# Altium PCB PunkController-PCB.PcbDoc
Units mm, origin at the board's own origin, x right, y up, seen from the top; angles counter-clockwise.
Board outline 65 x 80 mm, 2 copper layers (Top Layer, Bottom Layer); 21 components, 32 nets, 107 pads, 100 vias.
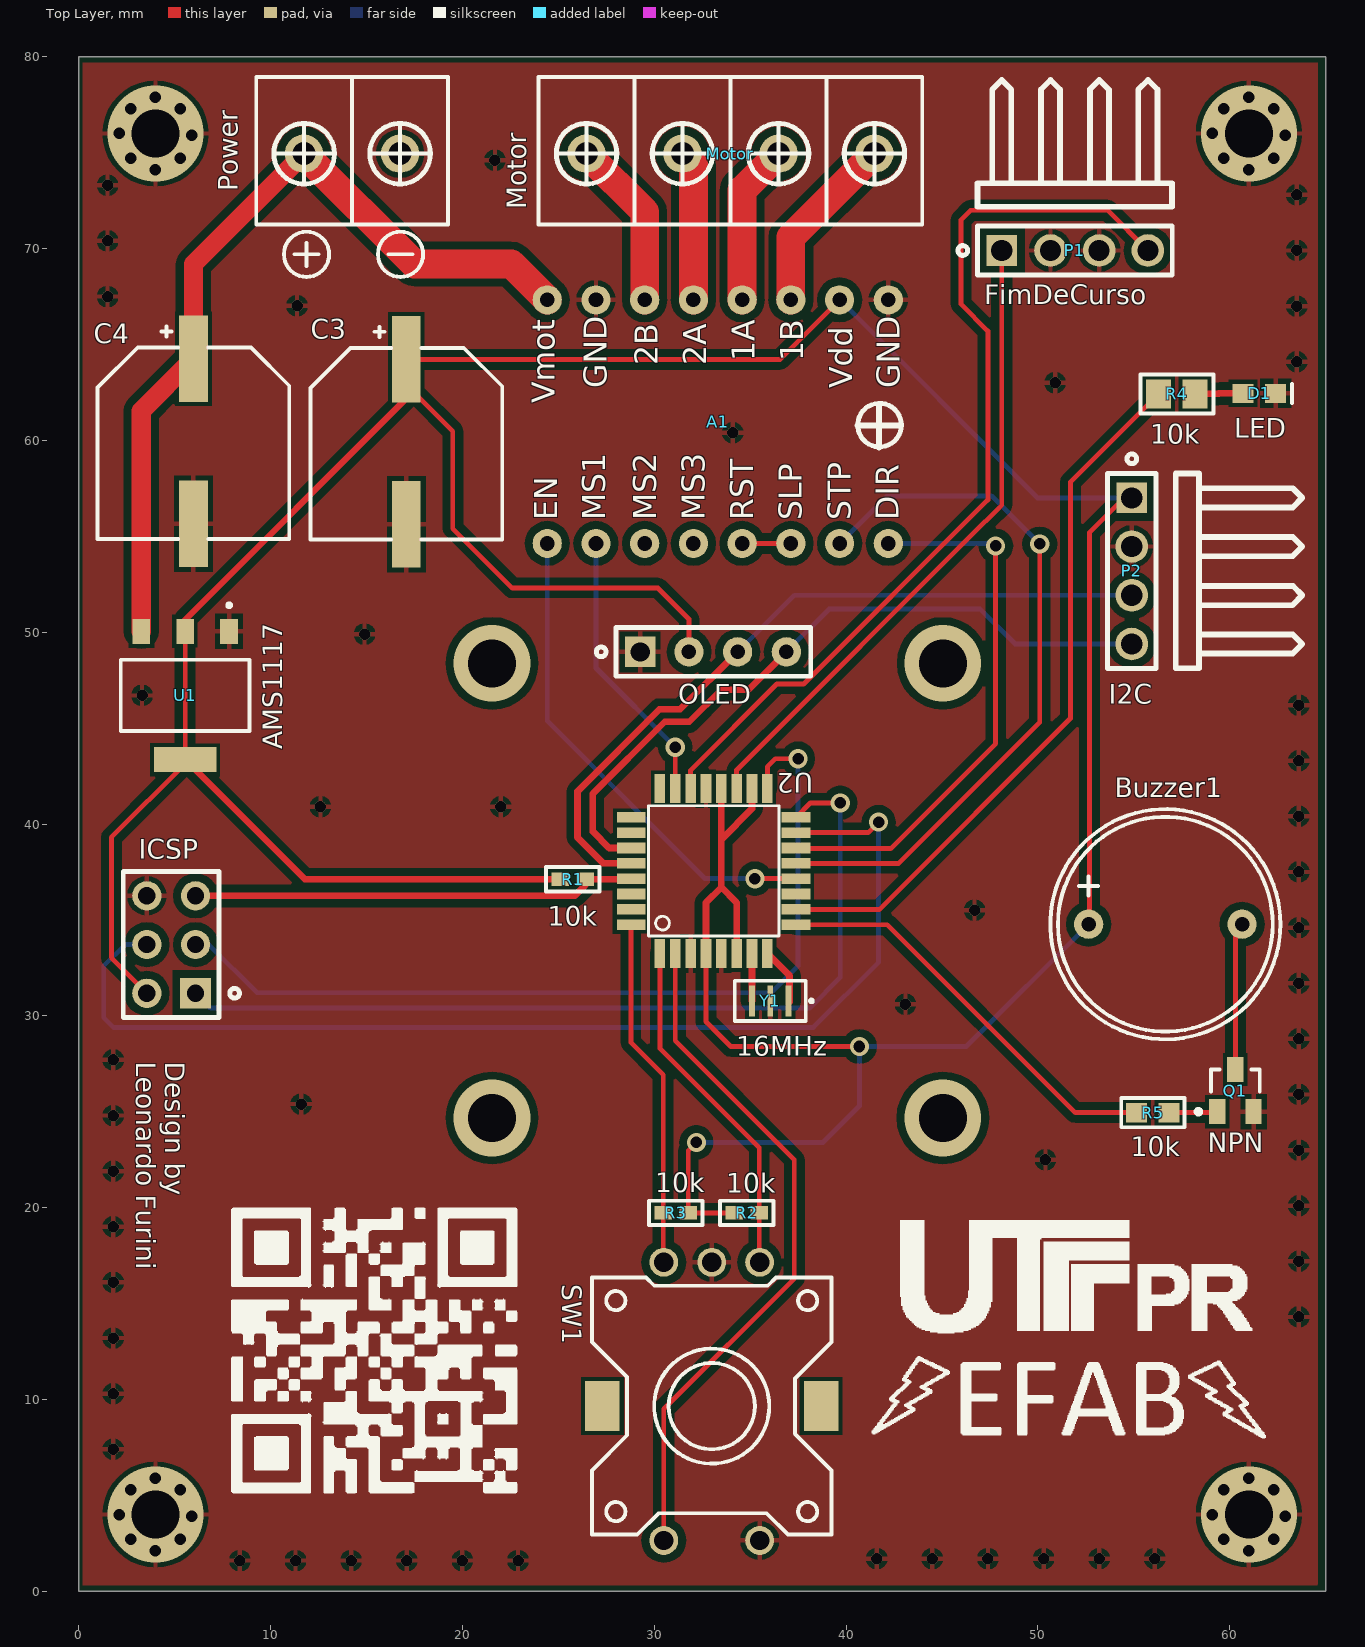
[diagram p0: Top Layer view]
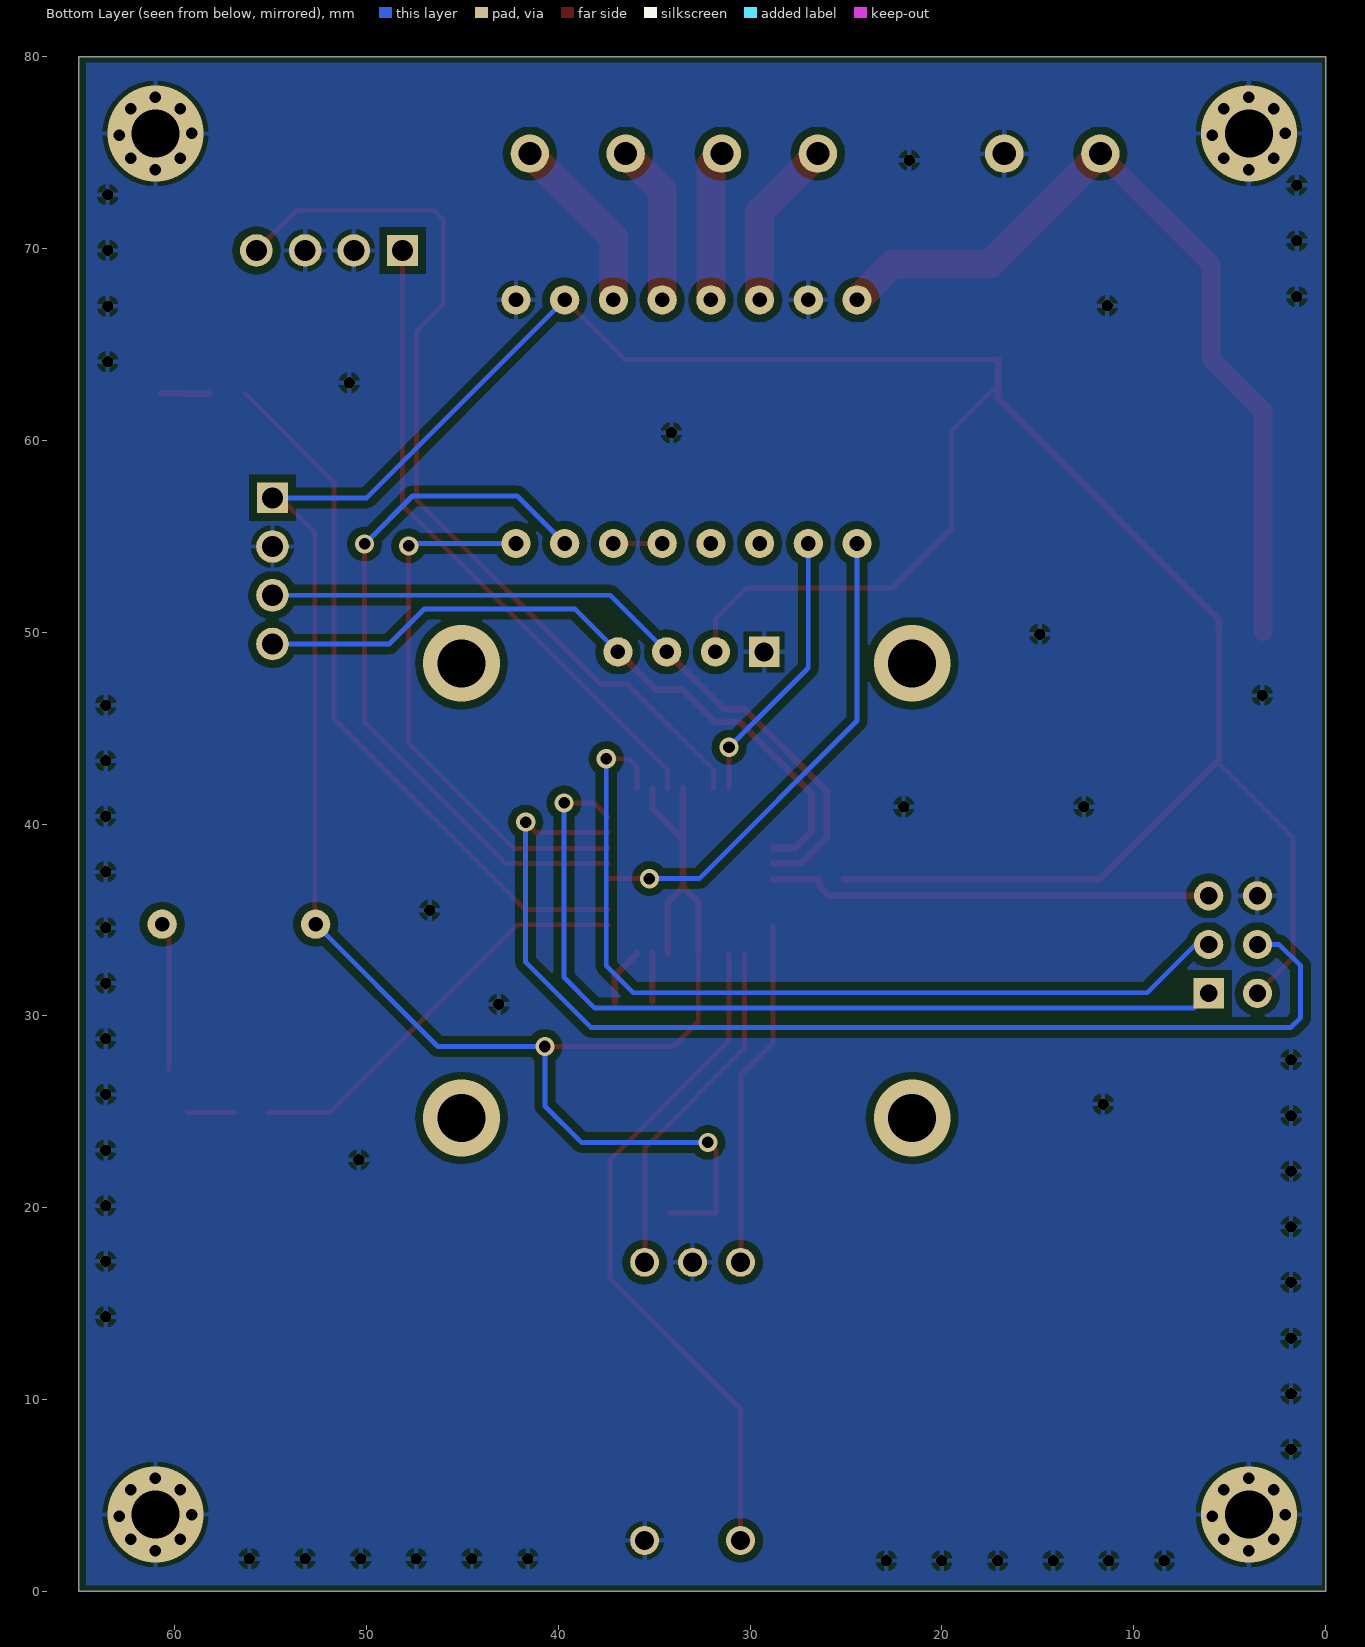
[diagram p1: Bottom Layer view, seen from below]
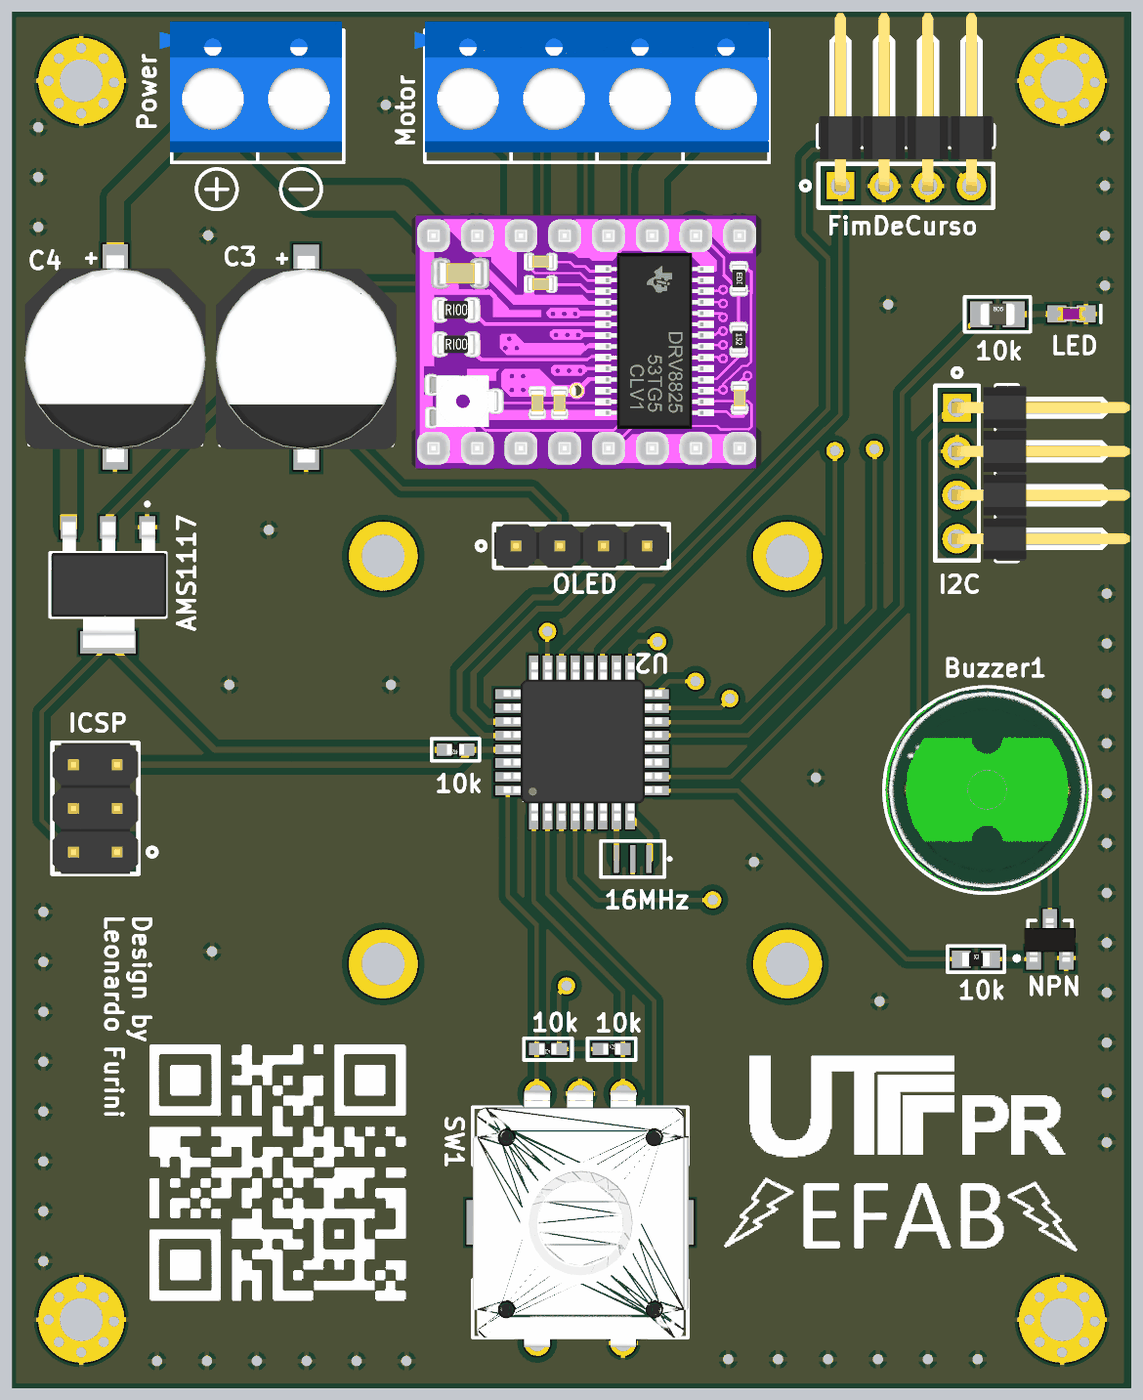
[diagram p2: 3D render of the assembled board from above, using the file's embedded part models]

## Layer stack, top to bottom
Top Solder: solder mask 0.0102, Solder Resist, Dk 3.5
Top Layer: signal copper 0.0356
Dielectric 1: dielectric 0.32, FR-4, Dk 4.8
Bottom Layer: signal copper 0.0356
Bottom Solder: solder mask 0.0102, Solder Resist, Dk 3.5

## Board outline
0,0 0,80 65,80 65,0

## Design rules (kind name [scope] priority, off if disabled: settings)
Clearance [All] p1: gap=0.2 ignorepadtopadclearanceinfootprint=FALSE except(0.3: Arc-Arc Arc-Track Arc-Via Track-Track Track-Via; 0.4: Arc-Fill Arc-Poly Arc-Region Track-Fill Track-Poly Track-Region THPad-Fill THPad-Poly THPad-Region Via-Fill Via-Poly Via-Region Via-Hole; 0.5: Arc-THPad Track-THPad; 0.8: Arc-Hole Track-Hole; 1: SMDPad-Hole THPad-Hole)
ComponentClearance [All] p1 off: gap=0.254 collisioncheckmode=3 verticalgap=0.254 showdistances=FALSE
Height [All] p1 off: minheight=0 maxheight=25.4 prefheight=12.7
PolygonConnect [All] p1: connectstyle=Relief reliefconductorwidth=0.254 reliefentries=4 polygonreliefangle="90 Angle" airgapwidth=0.254
RoutingVias [All] p1: holewidth=0.711 width=1.27 viastyle="Through Hole" minholewidth=0.711 minwidth=1.27 maxholewidth=0.711 maxwidth=1.27
SolderMaskExpansion [All] p1: expansion=0.102
Width [All] p1: maxlimit=1.5 minlimit=0.254 preferedwidth=0.35 minimp=50.000000 maximp=50.000000 favimp=50.000000
28 further rules are at their usual default settings.

## Components (designator, comment, footprint, x,y, rotation, side; value= is the part's Value field where it differs from the comment)
A1 "driver A4988" A4988 24.425,54.625 r90 top
Buzzer1 "Buzzer" "BUZZER 12MM" 56.65,34.775 r0 top
C3 "Capacitor Pol" CAP_AL_SMD_C6_10X10MM 17.075,59.825 r90 top
C4 "470uf" CAP_AL_SMD_C6_10X10MM 5.975,59.85 r90 top
D1 "LED" LED-0603-R 61.55,62.45 r0 top
ICSP "Header 3X2" HDR2X3M 6.09,31.175 r180 top
Motor "Motor" KRE-4 23.975,71.25 r0 top locked
OLED "Header 1x4" HDR1X4M 29.27,48.975 r0 top
P1 "FimDeCurso" HDR1X4-D 48.12,69.9 r0 top
P2 "I2C" HDR1X4-D 54.9,57.005 r270 top
Power "Power" KRE-2 9.25,71.25 r0 top
Q1 "NPN" SOT23 60.3,26.1 r0 top
R1 "10k" R1005[0402] 25.75,37.125 r180 top value=0
R2 "10k" R1005[0402] 34.825,19.725 r0 top value=0
R3 "10k" R1005[0402] 31.125,19.725 r180 top value=0
R4 "10k" R2012[0805] 57.25,62.425 r0 top value=0
R5 "10k" R1608[0603] 56,24.95 r0 top value=0
SW1 "PEC11R-4215F-S0024" ENCODER 33,9.65 r180 top
U1 "AMS1117" AMS1117 5.55,46.7 r270 top
U2 "ATMEGA328P-MU" "ATMEGA SMD" 33.1,37.55 r90 top
Y1 "16MHz" CRYSTAL-SMD 36.05,30.775 r180 top

## Footprints (in the part's own frame and the unit in brackets; to place one, negate y for a bottom-side part, rotate by r counter-clockwise, add the part's x,y. Pads: shape width x height; smd on the part's side, far side on the other; paste and mask are expansions set on the pad)
A4988 [mil]
  round 60 hole 30: 1(0,0) 2(0,-100) 3(0,-200) 4(0,-300) 5(0,-400) 6(0,-500) 7(0,-600) 8(0,-700) 9(500,-700) 10(500,-600) 11(500,-500) 12(500,-400) 13(500,-300) 14(500,-200) 15(500,-100) 16(500,0)
  silkscreen extent 197,-727 288,-637, body extent -48,-752 536,48, height 242
AMS1117 [mm]
  rect 1.31x0.93 smd: 1(-3.345,2.29) 2(-3.345,0) 3(-3.345,-2.29)
  rect 1.31x3.24 smd: 4(3.345,0)
  silkscreen extent -4.8,-3.36 1.86,3.36, body extent -3.65,-3.3 3.65,3.4, height 1.8
"ATMEGA SMD" [mm]
  rect 1.5x0.55 smd: 1(-4.3,2.8) 2(-4.3,2) 3(-4.3,1.2) 4(-4.3,0.4) 5(-4.3,-0.4) 6(-4.3,-1.2) 7(-4.3,-2) 8(-4.3,-2.8) 17(4.3,-2.8) 18(4.3,-2) 19(4.3,-1.2) 20(4.3,-0.4) 21(4.3,0.4) 22(4.3,1.2) 23(4.3,2) 24(4.3,2.8)
  rect 0.55x1.5 smd: 9(-2.8,-4.3) 10(-2,-4.3) 11(-1.2,-4.3) 12(-0.4,-4.3) 13(0.4,-4.3) 14(1.2,-4.3) 15(2,-4.3) 16(2.8,-4.3) 25(2.8,4.3) 26(2,4.3) 27(1.2,4.3) 28(0.4,4.3) 29(-0.4,4.3) 30(-1.2,4.3) 31(-2,4.3) 32(-2.8,4.3)
  silkscreen extent -3.4,-3.4 3.4,3.4, body extent -4.55,-4.65 4.65,4.55, height 1.2
"BUZZER 12MM" [mil]
  round 60 hole 30: 1(-157.48,0) 2(157.48,0)
  silkscreen extent -236,-236 236,236, body extent -233,-232 233,234, height 325
CAP_AL_SMD_C6_10X10MM [mm]
  rect 4.5x1.5 smd: 1(4.4,0) 2(-4.2,0)
  silkscreen extent -5,-5 6.1,5, body extent -6,-5.25 6,5.25, height 10.5
CRYSTAL-SMD [mm]
  rect 0.3x1.6 smd: 1(-0.95,0) 2(0,0) 3(0.95,0)
  silkscreen extent -2.22,-1.05 1.85,1.05
ENCODER [mm] "Hw-040"
  round 1.508 hole 1: 1(-2.5,7) 2(2.5,7) A(-2.5,-7.5) B(2.5,-7.5) C(0,-7.5)
  rect 1.8x2.6 smd: P1(-5.7,0) P2(5.7,0)
  silkscreen extent -6.25,-6.7 6.25,6.7, body extent -6.98,-7.68 6.92,7.25, height 26.5
HDR1X4-D [mm]
  rect 1.6x1.6 hole 1.1: 1(0,0)
  round 1.7 hole 1.1: 2(2.54,0) 3(5.08,0) 4(7.62,0)
  silkscreen extent -2.29,-1.27 8.89,8.89, body extent -1.27,-0.32 8.89,10.03, height 2.5
HDR1X4M [mil]
  rect 62.99x62.99 hole 39.37: 1(0,0)
  round 60 hole 30: 2(100,0) 3(200,0) 4(300,0)
  silkscreen extent -90,-50 350,50, body extent -50,-50 350,50, height 339
HDR2X3M [mil]
  rect 62.99x62.99 hole 35.43: 1(0,0)
  round 60 hole 35.43: 2(100,0) 3(0,-100) 4(100,-100) 5(0,-200) 6(100,-200)
  silkscreen extent -90,-250 148,50, body extent -48,-250 148,50, height 94
KRE-2 [mm]
  round 2 hole 1.2: 1(2.491,3.7) 2(7.5,3.7)
  silkscreen extent 0,0 10,7.7, body extent -0.7,0.6 9.9,8.2, height 10
KRE-4 [mm]
  round 2 hole 1.2: 1(2.491,3.7) 2(7.5,3.7) 3(12.509,3.7) 4(17.509,3.7)
  silkscreen extent 0,0 20,7.7, body extent -0.6,0.6 20,8.2, height 10
LED-0603-R [mm] "0603 Red LED"
  rect 1.1x1 smd: 1(-0.85,0) 2(0.85,0)
  silkscreen extent 1.7,-0.5 1.7,0.5, body extent -0.8,-0.4 0.8,0.4, height 0.6
R1005[0402] [mm] "Chip Resistor; Body 1.1 x 0.5 mm (LxW typ)"
  rect 0.9x0.7 smd: 1(-0.65,0) 2(0.65,0)
  silkscreen extent -1.4,-0.64 1.4,0.63, body extent -0.5,-0.3 0.5,0.3, height 0.2
R1608[0603] [mm] "Chip Resistor; Body 1.6 x 0.8 mm (LxW typ)"
  rect 1.1x1 smd: 1(-0.85,0) 2(0.85,0)
  silkscreen extent -1.65,-0.76 1.65,0.76, body extent -0.8,-0.4 0.8,0.4, height 0.3
R2012[0805] [mm] "Chip Resistor; Body 2.0 x 1.3 mm (LxW typ)"
  rect 1.3x1.5 smd: 1(-0.95,0) 2(0.95,0)
  silkscreen extent -1.9,-1.02 1.91,1.02, body extent -1,-0.62 1,0.63, height 0.8
SOT23 [mm] "SOT-23; 3 Leads; Body 3.0 x 2.6 mm, inc. leads (LxW max)"
  rect 0.85x1.3 smd: 1(-0.95,-1.1) 2(0.95,-1.1) 3(0,1.1)
  silkscreen extent -2.05,-1.22 1.28,1.1, body extent -1.5,-1.29 1.5,1.21, height 1.12

## Part data
C3 C4: library part CP, "Polarized Capacitor"
ICSP: "Header, 3-Pin, Dual row", LatestRevisionDate=17-Jul-2002, LatestRevisionNote="Re-released for DXP Platform.", Publisher="Altium Limited"
Motor P1 P2: library part "Header 1x4"
Power: library part "Header 2"
Q1: "NPN Bipolar Transistor"
R1 R2 R3 R4 R5: library part R, "Resistor"
SW1: library part Encoder, "Incremental Encoder, 12 Mm, Contact Rating 10 Ma - 5 Vdc", Package=None, Availability=Unavailable, MF=Bourns, MP=PEC11R-4215F-S0024, Price=None, SnapEDA_Link=https://www.snapeda.com/parts/PEC11R-4215F-S0024/Bourns%20-%20J.W.%20Miller/view-part/?ref=snap
U2: library part ATMEGA328P-MU-SMD, "Embedded microcontroller ATMEGA328P-MU VQFN 32 _5x5_ Microchip Technology 8-Bit 20 MHz I/O number 23", Package="VQFN-32 Microchip", Availability=Unavailable, MF=Microchip, MP=ATMEGA328P-MU, Price=None, SnapEDA_Link=https://www.snapeda.com/parts/ATMEGA328P-MU/Microchip/view-part/?ref=snap
Y1: library part Crystal-SMD

## Via types
v1: diameter 0.6, hole 0.6, Top Layer to Bottom Layer, tented both sides, 51 vias
v2: diameter 0.6, hole 0.6, Top Layer to Bottom Layer, 32 vias
v3: diameter 1, hole 0.6, Top Layer to Bottom Layer, 9 vias
v4: diameter 5, hole 2.5, Top Layer to Bottom Layer, 4 vias
v5: diameter 4, hole 2.5, Top Layer to Bottom Layer, 4 vias

## Nets (pads, with @x,y where several pads share a name; then routed paths per layer and width w, separated by ;. In a path a pad name is that pad's centre, name@x,y a point inside that pad or via, vN(x,y) a via of type N, cw(c..) or ccw(c..) an arc to the next point about the centre after c; other vN are vias at no path point)
+5: A1.10 Buzzer1.1 C3.1 ICSP.2 OLED.2 P2.1 R1.2 R2.1 R3.1 U1.2 U1.4 U2.4 U2.6 U2.18 U2.20 | length 214.9
  Top Layer w0.254: ICSP.2 1.7,33.025 1.7,39.3 5.55,43.15 U1.4 U1.2 ; C3.1@17.075,62.9 19.5,60.475 19.5,55.4 22.6,52.3 30.2,52.3 31.81,50.69 OLED.2 ; C3.1 36.565,64.225 A1.10 ; v3(32.2,23.4) 31.775,22.975 R3.1 R2.1 ; U2.4 32.7,29.7 34,28.4 v3(40.7,28.4) ; Buzzer1.1 52.7,34.825 52.7,55.2 54.505,57.005 P2.1
  Top Layer w0.35: U1.4 11.78,37.125 R1.2 ; U1.2 5.55,50.65 17.075,62.175 17.075,62.9 C3.1 ; U2.4 32.7,35.9 33.5,36.7 ; U2.20 33.5,39.2 ; U2.6 34.3,35.9 33.5,36.7 ; U2.18 35.1,40.8 33.5,39.2 ; 33.5,36.7 33.5,39.2
  Bottom Layer w0.254: v3(32.2,23.4) 38.8,23.4 40.7,25.3 v3(40.7,28.4) 46.275,28.4 Buzzer1.1 ; A1.10 49.985,57.005 P2.1
GND: A1.9 A1.15 C3.2 C4.2 D1.2 ICSP.6 OLED.1 P1.2 P1.3 P2.2 Power.2 Q1.2 SW1.1 SW1.C U1.1 U2.3 U2.5 U2.21 Y1.2
  other v1: 8.4,1.6 11.3,1.6 14.2,1.6 17.1,1.6 20,1.6 22.9,1.6 41.6,1.7 44.5,1.7 47.4,1.7 50.3,1.7 53.2,1.7 56.1,1.7 1.8,7.4 1.8,10.3 1.8,13.2 63.6,14.3 1.8,16.1 63.6,17.2 1.8,19 63.6,20.1 1.8,21.9 50.4,22.5 63.6,23 1.8,24.8 11.6,25.4 63.6,25.9 1.8,27.7 63.6,28.8 43.1,30.6 63.6,31.7 63.6,34.6 46.7,35.5 63.6,37.5 63.6,40.4 12.6,40.9 22,40.9 63.6,43.3 63.6,46.2 3.3,46.7 14.9,49.9 34.1,60.4 50.9,63 63.5,64.1 63.5,67 11.378,67.016 1.5,67.5 63.5,69.9 1.5,70.4 63.5,72.8 1.5,73.3 21.7,74.6
  other v2: 4,2.1 61,2.1 2.7,2.7 5.3,2.7 59.7,2.7 62.3,2.7 5.9,3.9 62.9,3.9 2.1,4 59.1,4 2.7,5.3 5.3,5.3 59.7,5.3 62.3,5.3 4,5.9 61,5.9 4,74.1 61,74.1 2.7,74.7 5.3,74.7 59.7,74.7 62.3,74.7 5.9,75.9 62.9,75.9 2.1,76 59.1,76 2.7,77.3 5.3,77.3 59.7,77.3 62.3,77.3 4,77.9 61,77.9
  other v4: 4,4 61,4 4,76 61,76
NetA1_1: A1.1 U2.12 | length 25.6
  Top Layer w0.254: v3(35.25,37.15) U2.12
  Bottom Layer w0.254: A1.1 24.425,45.375 32.65,37.15 v3(35.25,37.15)
NetA1_2: A1.2 U2.23 | length 14.5
  Top Layer w0.254: U2.23 v3(31.1,44)
  Bottom Layer w0.254: A1.2 26.965,48.135 v3(31.1,44)
NetA1_3: A1.3
NetA1_4: A1.4
NetA1_5: A1.5 A1.6 | length 2.5
  Top Layer w0.254: A1.5 A1.6
NetA1_7: A1.7 U2.13 | length 37.5
  Top Layer w0.254: U2.13 42.75,37.95 50.1,45.3 v3(50.1,54.6)
  Bottom Layer w0.254: A1.7 42.14,57.1 47.6,57.1 v3(50.1,54.6)
NetA1_8: A1.8 U2.14 | length 28.6
  Top Layer w0.254: U2.14 37.433,38.717 42.331,38.717 47.8,44.186 v3(47.8,54.5)
  Bottom Layer w0.254: A1.8 47.675,54.625 v3(47.8,54.5)
NetA1_11: A1.11 Motor.4 | length 9.4
  Top Layer w1.5: A1.11 37.125,70.591 Motor.4
NetA1_12: A1.12 Motor.3 | length 8.4
  Top Layer w1.5: A1.12 34.585,73.051 Motor.3
NetA1_13: A1.13 Motor.2 | length 7.9
  Top Layer w1.5: Motor.2 32.045,74.38 A1.13
NetA1_14: A1.14 Motor.1 | length 8.9
  Top Layer w1.5: Motor.1 29.505,71.911 A1.14
NetBuzzer1_2: Buzzer1.2 Q1.3 | length 7.7
  Top Layer w0.254: Q1.3 60.3,34.425 Buzzer1.2
NetD1_1: D1.1 R4.2 | length 2.5
  Top Layer w0.35: R4.2 59.425,62.425 59.45,62.45 D1.1
NetICSP_1: ICSP.1 U2.16 | length 46.3
  Top Layer w0.254: U2.16 38.15,41.1 v3(39.7,41.1)
  Bottom Layer w0.254: ICSP.1 6.865,30.4 38.1,30.4 39.7,32 v3(39.7,41.1)
NetICSP_3: ICSP.3 U2.17 | length 46.7
  Top Layer w0.254: U2.17 35.9,42.983 36.317,43.4 v3(37.5,43.4)
  Bottom Layer w0.254: ICSP.3 6.785,33.715 9.3,31.2 36.1,31.2 37.5,32.6 v3(37.5,43.4)
NetICSP_4: ICSP.4 U2.15 | length 59.3
  Top Layer w0.254: U2.15 41.15,39.55 v3(41.7,40.1)
  Bottom Layer w0.254: ICSP.4 2.415,33.715 1.3,32.6 1.3,29.9 1.8,29.4 38.3,29.4 41.7,32.8 v3(41.7,40.1)
NetICSP_5: ICSP.5 R1.1 U2.29 | length 23.3
  Top Layer w0.35: ICSP.5 25.855,36.255 26.4,36.8 R1.1 28.775,37.125 U2.29
NetOLED_3: OLED.3 P2.3 U2.28 | length 38.9
  Top Layer w0.35: U2.28 27.35,37.95 26,39.3 26,41.701 30.28,45.981 31.355,45.981 OLED.3
  Bottom Layer w0.254: OLED.3 37.3,51.925 P2.3
NetOLED_4: OLED.4 P2.4 U2.27 | length 37.2
  Top Layer w0.35: U2.27 27.65,38.75 26.8,39.6 26.8,41.582 30.549,45.331 31.831,45.331 33.5,47 34.915,47 OLED.4
  Bottom Layer w0.254: OLED.4 39.115,51.2 47,51.2 48.815,49.385 P2.4
NetP1_1: P1.1 U2.19 | length 33.8
  Top Layer w0.254: U2.19 34.3,42.814 47.269,55.783 47.283,55.783 48.12,56.62 P1.1
NetP1_4: P1.4 U2.22 | length 48.3
  Top Layer w0.254: U2.22 31.9,42.8 36.4,47.3 37.8,47.3 47.4,56.9 47.4,65.7 46,67.1 46,71.5 46.5,72 53.64,72 P1.4
NetQ1_1: Q1.1 R5.2 | length 2.5
  Top Layer w0.254: R5.2 59.3,24.95 Q1.1
NetR2_2: R2.2 SW1.A U2.1 | length 18.3
  Top Layer w0.254: U2.1 30.3,28.3 35.475,23.125 R2.2 35.475,17.175 SW1.A
NetR3_2: R3.2 SW1.B U2.32 | length 18.3
  Top Layer w0.254: U2.32 28.8,28.6 30.475,26.925 R3.2 30.475,17.175 SW1.B
NetR4_1: R4.1 U2.10 | length 37.3
  Top Layer w0.254: U2.10 41.75,35.55 51.7,45.5 51.7,57.825 R4.1
NetR5_1: R5.1 U2.9 | length 21.8
  Top Layer w0.254: U2.9 42.15,34.75 51.95,24.95 R5.1
NetSW1_2: SW1.2 U2.2 | length 36
  Top Layer w0.254: SW1.2 30.5,9.5 37.3,16.3 37.3,22.5 31.1,28.7 U2.2
NetU2_7: U2.7 Y1.3 | length 2.5
  Top Layer w0.35: Y1.3 U2.7
NetU2_8: U2.8 Y1.1 | length 3
  Top Layer w0.35: U2.8 37.05,32.1 Y1.1@37.05,30.725
VCC: A1.16 C4.1 Power.1 U1.3 | length 44.3
  Top Layer w1: U1.3 3.26,61.535 C4.1 5.975,69.184 Power.1
  Top Layer w1.5: Power.1 17.491,69.2 22.55,69.2 A1.16
pads on no net: SW1.P1 SW1.P2 U2.11 U2.24 U2.25 U2.26 U2.30 U2.31
copper on no net:
  other v5: 21.55,24.675 45.05,24.675 21.55,48.375 45.05,48.375

## Polygon pours and split planes (outlines as drawn)
GND on Bottom Layer (solid, pour order 4): 0.2,79.7 0.2,0.3 64.6,0.3 64.6,79.7
GND on Top Layer "Top Layer-GND" (solid, pour order 0): 0.2,79.7 0.2,0.3 64.7,0.3 64.6,0.4 64.6,79.7 0.3,79.7

## Silkscreen, mask and mechanical layers (free items; w line width, h text height)
Top Overlay:
  drawing of 61 lines, arcs and shapes, not listed
  text "Design by / Leonardo Furini" at 3,27.6 h1 r270
Mechanical 15:
  the board outline again, w0.1

## Text inside footprints (layer, text, board x,y; h text height)
A1: Top Overlay "Vmot" at 24.806,61.928 h1.2 r90; Top Overlay "GND" at 27.524,62.728 h1.2 r90; Top Overlay "2B" at 30.191,63.927 h1.2 r90; Top Overlay "2A" at 32.705,63.927 h1.2 r90; Top Overlay "1A" at 35.245,64.127 h1.2 r90; Top Overlay "1B" at 37.76,64.127 h1.2 r90; Top Overlay "Vdd" at 40.325,62.728 h1.2 r90; Top Overlay "GND" at 42.815,62.728 h1.2 r90; Top Overlay "DIR" at 42.738,55.844 h1.2 r90; Top Overlay "STP" at 40.249,55.844 h1.2 r90; Top Overlay "SLP" at 37.684,55.844 h1.2 r90; Top Overlay "RST" at 35.169,55.844 h1.2 r90; Top Overlay "MS3" at 32.629,55.844 h1.2 r90; Top Overlay "MS2" at 30.115,55.844 h1.2 r90; Top Overlay "MS1" at 27.448,55.844 h1.2 r90; Top Overlay "EN" at 24.933,55.844 h1.2 r90